# EAGLE board Board-v1.3 (EAGLE 9.7.0)
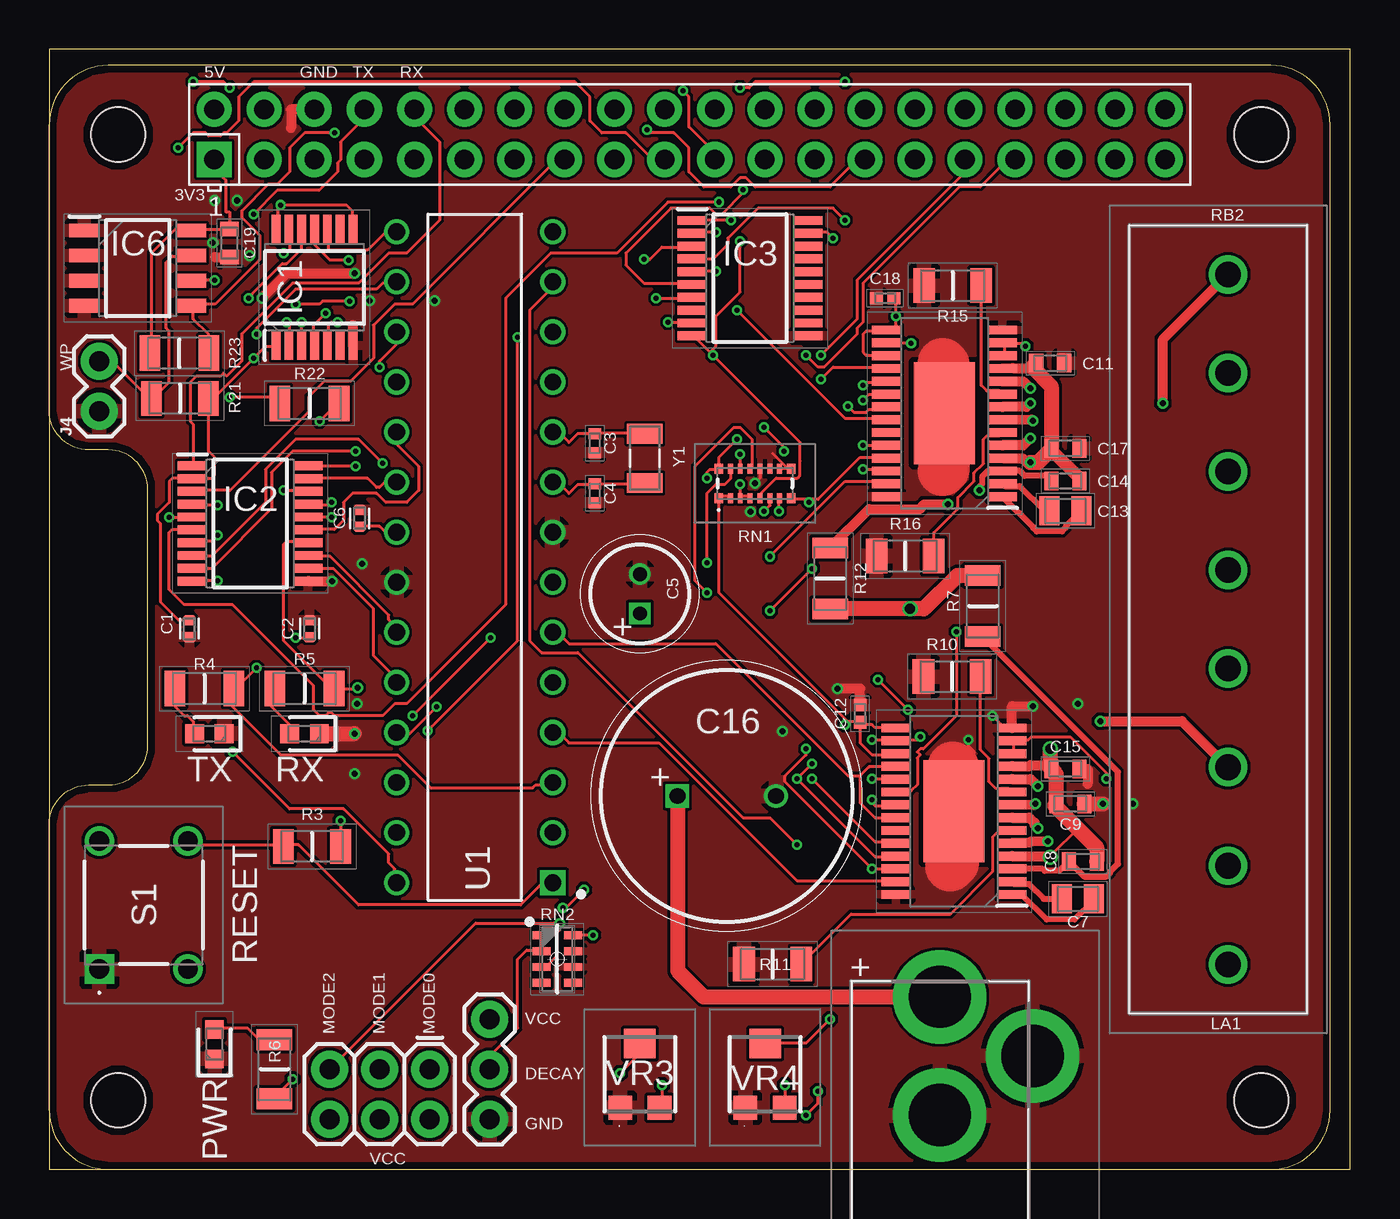
[diagram p0: board, top side]
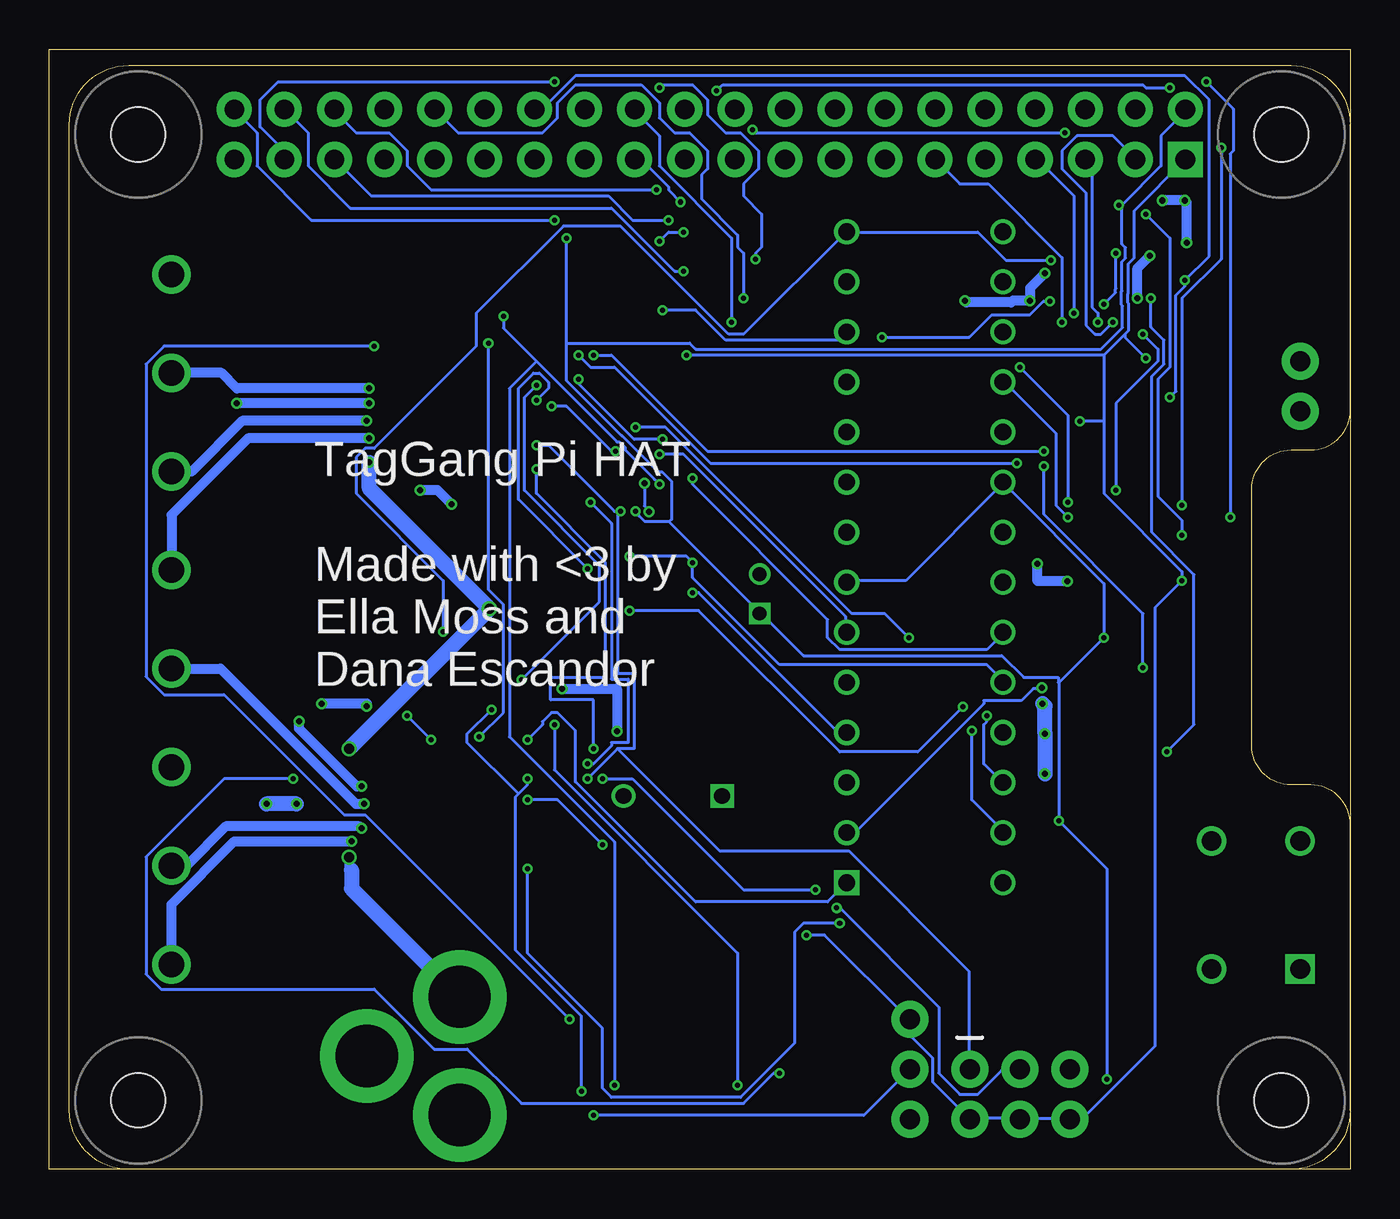
[diagram p1: board, bottom side, seen from below]

Size 66.02 x 56.82 mm. Coordinates in mm from the lower left corner, seen from the top.
Outline: 0,0 66.02,0 66.02,56.82 0,56.82 0,0
Copper layers (1*16): Top / Bottom
Stack-up Default Layer Stack: Top User Defined 0.035559375mm / Dielectric-1 User Defined 1.6mm / Bottom User Defined 0.035559375mm
Design rules "oshpark-2layer": minimum track width 6mil, minimum drill 10mil, track to track 6mil, track to pad 6mil, pad to pad 6mil, via to via 6mil, smd to smd 6mil, copper to edge 15mil, drill to drill 6mil, minimum pad ring 5mil, minimum via ring 5mil, stop-mask expansion 2.5mil, vias tented up to drill 0mil, thermal gap 10mil

## Footprints (pad centres in the part's own frame; a part is rotated, then mirrored left to right if it is on the bottom)
CAPC1005X55N = smd 0.54 x 0.6: 1 -0.43,0; 2 0.43,0
CAPC1005X55N' = smd 0.56 x 0.62: 1 -0.48,0; 2 0.48,0
CAPPRD200W52D500H1250 = drill 0.7 pad 1.1 square: 1 0,0 | drill 0.7 pad 1.1: 2 2,0
CAPC2012X94N = smd 1.02 x 1.47: 1 -0.81,0; 2 0.81,0
CAPC1608X90N = smd 0.73 x 0.94: 1 -0.71,0; 2 0.71,0
CAPC1005X55N'' = smd 0.65 x 0.62: 1 -0.44,0; 2 0.44,0
CAPPRD500W60D1275H2650 = drill 0.8 pad 1.2 square: 1 0,0 | drill 0.8 pad 1.2: 2 5,0
SOP65P640X120-14N = smd 1.475 x 0.45: 1 -2.938,1.95; 2 -2.938,1.3; 3 -2.938,0.65; 4 -2.938,0; 5 -2.938,-0.65; 6 -2.938,-1.3; 7 -2.938,-1.95; 8 2.938,-1.95; 9 2.938,-1.3; 10 2.938,-0.65; 11 2.938,0; 12 2.938,0.65; 13 2.938,1.3; 14 2.938,1.95
SOP65P640X120-20N = smd 1.475 x 0.45: 1 -2.938,2.925; 2 -2.938,2.275; 3 -2.938,1.625; 4 -2.938,0.975; 5 -2.938,0.325; 6 -2.938,-0.325; 7 -2.938,-0.975; 8 -2.938,-1.625; 9 -2.938,-2.275; 10 -2.938,-2.925; 11 2.938,-2.925; 12 2.938,-2.275; 13 2.938,-1.625; 14 2.938,-0.975; 15 2.938,-0.325; 16 2.938,0.325; 17 2.938,0.975; 18 2.938,1.625; 19 2.938,2.275; 20 2.938,2.925
SOP65P640X120-29N = smd 1.475 x 0.45: 1 -2.938,4.225; 2 -2.938,3.575; 3 -2.938,2.925; 4 -2.938,2.275; 5 -2.938,1.625; 6 -2.938,0.975; 7 -2.938,0.325; 8 -2.938,-0.325; 9 -2.938,-0.975; 10 -2.938,-1.625; 11 -2.938,-2.275; 12 -2.938,-2.925; 13 -2.938,-3.575; 14 -2.938,-4.225; 15 2.938,-4.225; 16 2.938,-3.575; 17 2.938,-2.925; 18 2.938,-2.275; 19 2.938,-1.625; 20 2.938,-0.975; 21 2.938,-0.325; 22 2.938,0.325; 23 2.938,0.975; 24 2.938,1.625; 25 2.938,2.275; 26 2.938,2.925; 27 2.938,3.575; 28 2.938,4.225 | smd 3.1 x 5.18: 29 0,0
SOIC127P600X175-8N = smd 1.525 x 0.7: 1 -2.712,1.905; 2 -2.712,0.635; 3 -2.712,-0.635; 4 -2.712,-1.905; 5 2.712,-1.905; 6 2.712,-0.635; 7 2.712,0.635; 8 2.712,1.905
1X03 = drill 1.016 pad 1.88: 1 0,0; 2 2.54,0; 3 5.08,0
PRT00119 = drill 3.162 pad 4.743: 1 -5.664,-1.286; 2 0.336,-1.286; 3 -2.664,3.414
TB00150008BE = drill 1.3 pad 1.95: 1 0,0; 2 5,0; 3 10,0; 4 15,0; 5 20,0; 6 25,0; 7 30,0; 8 35,0
1X02 = drill 1.016 pad 1.88: 1 0,0; 2 2.54,0
2X3 = drill 1.016 pad 1.88: 1 0,0; 2 0,2.54; 3 2.54,0; 4 2.54,2.54; 5 5.08,0; 6 5.08,2.54
LEDC1608X80N = smd 0.95 x 0.95: 1 -0.75,0; 2 0.75,0
RESC3116X65N = smd 1.05 x 1.75: 1 -1.45,0; 2 1.45,0
RESC3216X60N = smd 1.05 x 1.8: 1 -1.5,0; 2 1.5,0
RESC3216X70N = smd 1.05 x 1.8: 1 -1.55,0; 2 1.55,0
RESC3216X70N' = smd 1.1 x 1.75: 1 -1.45,0; 2 1.45,0
EXBU2H = smd 0.425 x 0.5: 1 -1.837,-0.75; 8 1.837,-0.75; 9 1.837,0.75; 16 -1.837,0.75 | smd 0.25 x 0.5: 2 -1.25,-0.75; 3 -0.75,-0.75; 4 -0.25,-0.75; 5 0.25,-0.75; 6 0.75,-0.75; 7 1.25,-0.75; 10 1.25,0.75; 11 0.75,0.75; 12 0.25,0.75; 13 -0.25,0.75; 14 -0.75,0.75; 15 -1.25,0.75
CAPCAV80P155X320X60-8L = smd 0.9 x 0.4: 1 -0.8,1.2; 2 0.8,1.2; 3 -0.8,0.4; 4 0.8,0.4; 5 -0.8,-0.4; 6 0.8,-0.4; 7 -0.8,-1.2; 8 0.8,-1.2
PTS645SH952LFS = drill 1 pad 1.5 square: 1 0,0 | drill 1 pad 1.5: 2 6.5,0; 3 0,-4.5; 4 6.5,-4.5
DIP794W46P254L2967H457Q28B = drill 0.85 square: 1 -3.96,16.51 | drill 0.85: 2 -3.96,13.97; 3 -3.96,11.43; 4 -3.96,8.89; 5 -3.96,6.35; 6 -3.96,3.81; 7 -3.96,1.27; 8 -3.96,-1.27; 9 -3.96,-3.81; 10 -3.96,-6.35; 11 -3.96,-8.89; 12 -3.96,-11.43; 13 -3.96,-13.97; 14 -3.96,-16.51; 15 3.96,-16.51; 16 3.96,-13.97; 17 3.96,-11.43; 18 3.96,-8.89; 19 3.96,-6.35; 20 3.96,-3.81; 21 3.96,-1.27; 22 3.96,1.27; 23 3.96,3.81; 24 3.96,6.35; 25 3.96,8.89; 26 3.96,11.43; 27 3.96,13.97; 28 3.96,16.51
TC33X2503E = smd 1.2 x 1.2: 1 -1,-1.7; 3 1,-1.7 | smd 1.6 x 1.5: 2 0,1.55
RASPI_BOARD_B+HAT_DF = drill 1 pad 1.778 square: 1 8.37,51.23 | drill 1 pad 1.778: 2 8.37,53.77; 3 10.91,51.23; 4 10.91,53.77; 5 13.45,51.23; 6 13.45,53.77; 7 15.99,51.23; 8 15.99,53.77; 9 18.53,51.23; 10 18.53,53.77; 11 21.07,51.23; 12 21.07,53.77; 13 23.61,51.23; 14 23.61,53.77; 15 26.15,51.23; 16 26.15,53.77; 17 28.69,51.23; 18 28.69,53.77; 19 31.23,51.23; 20 31.23,53.77; 21 33.77,51.23; 22 33.77,53.77; 23 36.31,51.23; 24 36.31,53.77; 25 38.85,51.23; 26 38.85,53.77; 27 41.39,51.23; 28 41.39,53.77; 29 43.93,51.23; 30 43.93,53.77; 31 46.47,51.23; 32 46.47,53.77; 33 49.01,51.23; 34 49.01,53.77; 35 51.55,51.23; 36 51.55,53.77; 37 54.09,51.23; 38 54.09,53.77; 39 56.63,51.23; 40 56.63,53.77 | hole 2.75: 3.5,3.5; 3.5,52.5; 61.5,3.5; 61.5,52.5
XTAL_CC7V-T1A-32.768KHZ-12.5PF-20PPM-TA-QC = smd 1 x 1.8: 1 -1.25,0; 2 1.25,0

## Placement (x,y rotation side)
C1  CC0402MRX5R6BB104  [CAPC1005X55N]  7.11,27.43 90 top
C2  CC0402MRX5R6BB104  [CAPC1005X55N]  13.21,27.43 270 top
C3  0402N150F500CT  [CAPC1005X55N']  27.69,36.83 90 top
C4  0402N150F500CT  [CAPC1005X55N']  27.69,34.29 90 top
C5  860020472001  [CAPPRD200W52D500H1250]  29.97,28.19 90 top
C6  CC0402MRX5R6BB104  [CAPC1005X55N]  15.75,33.02 90 top
C7  08055C103KAT4A  [CAPC2012X94N]  52.2,13.72 180 top
C8  CL10B104KA8NNNC  [CAPC1608X90N]  52.45,15.62 0 top
C9  CL10B104KA8NNNC  [CAPC1608X90N]  51.82,18.54 180 top
C11  CL10B104KA8NNNC  [CAPC1608X90N]  50.8,40.89 180 top
C12  C0402C474K9PACTU  [CAPC1005X55N'']  41.15,23.11 270 top
C13  08055C103KAT4A  [CAPC2012X94N]  51.56,33.4 180 top
C14  CL10B104KA8NNNC  [CAPC1608X90N]  51.56,34.92 0 top
C15  CL10B104KA8NNNC  [CAPC1608X90N]  51.56,20.32 180 top
C16  EGXF101ELL201MK25S  [CAPPRD500W60D1275H2650]  31.88,18.94 0 top
C17  CL10B104KA8NNNC  [CAPC1608X90N]  51.56,36.58 180 top
C18  C0402C474K9PACTU  [CAPC1005X55N'']  42.42,44.2 0 top
C19  CL10B104KA8NNNC  [CAPC1608X90N]  9.14,46.99 90 top
IC1  TXS0104EPWR  [SOP65P640X120-14N]  13.46,44.74 90 top
IC2  TXS0108EPWRG4  [SOP65P640X120-20N]  10.2,32.77 0 top
IC3  TXS0108EPWRG4  [SOP65P640X120-20N]  35.56,45.21 0 top
IC4  DRV8825PWPR  [SOP65P640X120-29N]  45.91,18.17 180 top
IC5  DRV8825PWPR  [SOP65P640X120-29N]  45.43,38.35 180 top
IC6  CAT24C32WI-GT3  [SOIC127P600X175-8N]  4.49,45.72 0 top
J1  [1X03]  22.35,2.54 90 top
J2  PRT-00119  [PRT00119]  46.48,3.09 270 top
J3  TB001-500-08BE  [TB00150008BE]  59.82,10.4 90 top
J4  [1X02]  2.54,38.46 90 top
J5  FEMALE 2x3  [2X3]  19.3,5.08 180 top
PWR  150060GS75000  [LEDC1608X80N]  8.38,6.35 90 top
R3  CRGCQ1206F1K0  [RESC3116X65N]  13.34,16.38 0 top
R4  CRCW1206360RJNEA  [RESC3216X60N]  7.87,24.38 0 top
R5  CRCW1206360RJNEA  [RESC3216X60N]  12.95,24.38 0 top
R6  CRCW1206360RJNEA  [RESC3216X60N]  11.43,5.08 90 top
R7  RK73B2BTTD105J  [RESC3216X70N]  47.37,28.57 90 top
R10  73L4R20J  [RESC3216X70N']  45.81,25 0 top
R11  73L4R20J  [RESC3216X70N']  36.7,10.41 0 top
R12  RK73B2BTTD105J  [RESC3216X70N]  39.62,29.97 270 top
R15  73L4R20J  [RESC3216X70N']  45.85,44.83 0 top
R16  73L4R20J  [RESC3216X70N']  43.43,31.11 0 top
R21  CRGCQ1206F1K0  [RESC3116X65N]  6.63,39.12 0 top
R22  CRCW12063K90FKEA  [RESC3216X60N]  13.21,38.86 0 top
R23  CRCW12063K90FKEA  [RESC3216X60N]  6.6,41.4 180 top
RN1  EXB-U2H103JV  [EXBU2H]  35.81,34.8 0 top
RN2  CAT16-103J4LF  [CAPCAV80P155X320X60-8L]  25.78,10.67 0 top
RX  150060RS75000  [LEDC1608X80N]  12.95,22.1 180 top
S1  PTS645SH952LFS  [PTS645SH952LFS]  2.54,10.16 90 top
TX  150060GS75000  [LEDC1608X80N]  8.13,22.1 180 top
U1  ATMEGA328P-PU  [DIP794W46P254L2967H457Q28B]  21.59,31.05 180 top
VR3  TC33X-2-103G  [TC33X2503E]  29.97,4.83 0 top
VR4  TC33X-2-103G  [TC33X2503E]  36.32,4.83 0 top
X1  RASPI_BOARD_B+_HD  [RASPI_BOARD_B+HAT_DF]  0,0 0 top
Y1  CC7V-T1A-32.768KHZ-12.5PF-20PPM-TA-QC  [XTAL_CC7V-T1A-32.768KHZ-12.5PF-20PPM-TA-QC]  30.23,36.07 270 top

## Library data of the parts
C1 C2 C6 = CC0402MRX5R6BB104; DESCRIPTION: 0.1 µF ±20% 10V Ceramic Capacitor X5R 0402 (1005 Metric); DIGIKEY_PART_NUMBER: 311-1731-2-ND; MF: Yageo; MP: CC0402MRX5R6BB104; PACKAGE: 0402 Yageo; PURCHASE-URL: https://pricing.snapeda.com/search?q=CC0402MRX5R6BB104&ref=eda
C3 C4 = 0402N150F500CT; DESCRIPTION: Multilayer Ceramic Capacitors MLCC - SMD/SMT 0402 MLCC NPO 15 pF +/- 1% 50 V T&R GP; HEIGHT: 0.55mm; MANUFACTURER_NAME: Walsin Technology Corporation; MANUFACTURER_PART_NUMBER: 0402N150F500CT
C5 = 860020472001; DESCRIPTION: Wurth Elektronik 4.7uF 25 V dc Aluminium Electrolytic Capacitor, WCAP-ATG5 Series 2000h 5 (Dia.) x 11mm; HEIGHT: 12.5mm; MANUFACTURER_NAME: Wurth Elektronik; MANUFACTURER_PART_NUMBER: 860020472001; MOUSER_PART_NUMBER: 710-860020472001; MOUSER_PRICE-STOCK: https://www.mouser.co.uk/ProductDetail/Wurth-Elektronik/860020472001?qs=0KOYDY2FL2%2F%252BlYkeK95R6A%3D%3D
C7 C13 = 08055C103KAT4A; DESCRIPTION: Multilayer Ceramic Capacitors MLCC - SMD/SMT 50V .01uF X7R 0805 10%TOL; HEIGHT: 0.94mm; MANUFACTURER_NAME: AVX; MANUFACTURER_PART_NUMBER: 08055C103KAT4A; MOUSER_PART_NUMBER: 581-08055C103KAT4A; MOUSER_PRICE-STOCK: https://www.mouser.com/Search/Refine.aspx?Keyword=581-08055C103KAT4A
C8 C9 C11 C14 C15 C17 C19 = CL10B104KA8NNNC; DESCRIPTION: Ceramic cap 0603 X7R 25V 100nF (Reel) Samsung Electro-Mechanics 100nF Multilayer Ceramic Capacitor (MLCC) 25 V +/-10% X7R dielectric CL max op. temp. +125C; HEIGHT: 0.9mm; MANUFACTURER_NAME: SAMSUNG; MANUFACTURER_PART_NUMBER: CL10B104KA8NNNC; MOUSER_PART_NUMBER: 187-CL10B104KA8NNNC; MOUSER_PRICE-STOCK: https://www.mouser.co.uk/ProductDetail/Samsung-Electro-Mechanics/CL10B104KA8NNNC?qs=349EhDEZ59rmu3pGeZXx0A%3D%3D
C12 C18 = C0402C474K9PACTU; DESCRIPTION: SMD Comm X5R, Ceramic, 0.47 uF, 10%, 6.3 VDC, 15.75 VDC, 85C, -55C, X5R, SMD, MLCC, Temperature Stable, Class II, 10 % , 1.0638 GOhms, 1.21 mg, 0402, 1mm, 0.5mm, 0.5mm, 0.3mm, 0.3mm, 10000, 78 Weeks, 70; HEIGHT: 0.55mm; MANUFACTURER_NAME: KEMET; MANUFACTURER_PART_NUMBER: C0402C474K9PACTU; MOUSER_PART_NUMBER: 80-C0402C474K9P; MOUSER_PRICE-STOCK: https://www.mouser.co.uk/ProductDetail/KEMET/C0402C474K9PACTU?qs=KHg1sw%2FVM5RivoKJ3oVJkQ%3D%3D
C16 = EGXF101ELL201MK25S; DESCRIPTION: Aluminum Electrolytic Capacitors - Radial Leaded 200uF 100 Volts 20%; HEIGHT: 26.5mm; MANUFACTURER_NAME: Chemi-Con; MANUFACTURER_PART_NUMBER: EGXF101ELL201MK25S; MOUSER_PART_NUMBER: 661-EGXF101ELL201MK2; MOUSER_PRICE-STOCK: https://www.mouser.co.uk/ProductDetail/United-Chemi-Con/EGXF101ELL201MK25S?qs=8BXZADTIn4FXlUL9JzZ4Ow%3D%3D
IC1 = TXS0104EPWR; DESCRIPTION: TXS0104EPWR, Voltage Level Translator, Open Drain 1.65 3.6 V, 2.3 5.5 V 14-Pin TSSOP; HEIGHT: 1.2mm; MANUFACTURER_NAME: Texas Instruments; MANUFACTURER_PART_NUMBER: TXS0104EPWR; MOUSER_PART_NUMBER: 595-TXS0104EPWR; MOUSER_PRICE-STOCK: https://www.mouser.co.uk/ProductDetail/Texas-Instruments/TXS0104EPWR?qs=7kv20MEVUlglsv2MH6ZndA%3D%3D
IC2 IC3 = TXS0108EPWRG4; DESCRIPTION: Translation - Voltage Levels 8B Bidir Vltg-Level Translator; HEIGHT: 1.2mm; MANUFACTURER_NAME: Texas Instruments; MANUFACTURER_PART_NUMBER: TXS0108EPWRG4; MOUSER_PART_NUMBER: 595-TXS0108EPWRG4; MOUSER_PRICE-STOCK: https://www.mouser.co.uk/ProductDetail/Texas-Instruments/TXS0108EPWRG4?qs=wkx8pu8tL7LKCwSiM1j4%252Bw%3D%3D
IC4 IC5 = DRV8825PWPR; DESCRIPTION: 2.5A Bipolar Stepper Motor Driver with On-Chip 1/32 Microstepping Indexer (Step/Dir Ctrl); HEIGHT: 1.2mm; MANUFACTURER_NAME: Texas Instruments; MANUFACTURER_PART_NUMBER: DRV8825PWPR; MOUSER_PART_NUMBER: 595-DRV8825PWPR; MOUSER_PRICE-STOCK: https://www.mouser.co.uk/ProductDetail/Texas-Instruments/DRV8825PWPR?qs=L4ss%2FyqpMWRQV%252B0JWK8r%2FQ%3D%3D
IC6 = CAT24C32WI-GT3; DESCRIPTION: EEPROM Serial-I2C 32K 4Kx8 1.8V/5V SOIC8 CAT24C32WI-GT3, EEPROM Memory 32kbit,, 4096 x, 8bit, Serial-I2C 1.7 5.5 V, 8-Pin SOIC; HEIGHT: 1.75mm; MANUFACTURER_NAME: onsemi; MANUFACTURER_PART_NUMBER: CAT24C32WI-GT3; MOUSER_PART_NUMBER: 698-CAT24C32WI-GT3; MOUSER_PRICE-STOCK: https://www.mouser.co.uk/ProductDetail/onsemi/CAT24C32WI-GT3?qs=rZgeL6XvLwaTa79VuYkKQA%3D%3D
J1 J4 = SparkFun-Connectors
J2 = PRT-00119; DESCRIPTION: SparkFun Accessories DC Barrel Power Jack/Connector; HEIGHT: 11mm; MANUFACTURER_NAME: SparkFun; MANUFACTURER_PART_NUMBER: PRT-00119; MOUSER_PART_NUMBER: 474-PRT-00119; MOUSER_PRICE-STOCK: https://www.mouser.co.uk/ProductDetail/SparkFun/PRT-00119?qs=WyAARYrbSnbnQpS9xf%252Bx5A%3D%3D
J3 = TB001-500-08BE; DESCRIPTION: Fixed Terminal Blocks Terminal block, screw type, 5.00 , horizontal, 8 poles, CUI Blue, slotted screw, PCB mount; HEIGHT: 12.9mm; MANUFACTURER_NAME: CUI Devices; MANUFACTURER_PART_NUMBER: TB001-500-08BE; MOUSER_PART_NUMBER: 490-TB001-500-08BE; MOUSER_PRICE-STOCK: https://www.mouser.co.uk/ProductDetail/CUI-Devices/TB001-500-08BE?qs=vLWxofP3U2yEuwKNSzgFJw%3D%3D
J5 = SparkFun-Connectors; PROD_ID: CONN-11566
PWR TX = 150060GS75000; DESCRIPTION: Wurth Elektronik WL-SMCW 520 nm Green LED, 1608 (0603) Clear SMD package; HEIGHT: 0.8mm; MANUFACTURER_NAME: Wurth Elektronik; MANUFACTURER_PART_NUMBER: 150060GS75000; MOUSER_PART_NUMBER: 710-150060GS75000; MOUSER_PRICE-STOCK: https://www.mouser.co.uk/ProductDetail/Wurth-Elektronik/150060GS75000?qs=LlUlMxKIyB0UYkq5lDO8nA%3D%3D
R3 R21 = CRGCQ1206F1K0; DESCRIPTION: SMD AEC-Q200 Compliant Thick Film Chip Resistor,; HEIGHT: 0.65mm; MANUFACTURER_NAME: TE Connectivity; MANUFACTURER_PART_NUMBER: CRGCQ1206F1K0; MOUSER_PART_NUMBER: 279-CRGCQ1206F1K0; MOUSER_PRICE-STOCK: https://www.mouser.co.uk/ProductDetail/TE-Connectivity-Holsworthy/CRGCQ1206F1K0?qs=wUXugUrL1qxm2LgdVtGvlQ%3D%3D
R4-R6 = CRCW1206360RJNEA; DESCRIPTION: Thick Film Resistors - SMD 1/4watt 360ohms 5%; HEIGHT: 0.6mm; MANUFACTURER_NAME: Vishay; MANUFACTURER_PART_NUMBER: CRCW1206360RJNEA; MOUSER_PART_NUMBER: 71-CRCW1206J-360-E3; MOUSER_PRICE-STOCK: https://www.mouser.co.uk/ProductDetail/Vishay-Dale/CRCW1206360RJNEA?qs=f6iYHOF0qgQa5fU%252BdQhP8Q%3D%3D
R7 R12 = RK73B2BTTD105J; DESCRIPTION: Thick Film Resistors - SMD 1/4watts 1Mohms 5%; HEIGHT: 0.7mm; MANUFACTURER_NAME: KOA Speer; MANUFACTURER_PART_NUMBER: RK73B2BTTD105J
R10 R11 R15 R16 = 73L4R20J; DESCRIPTION: Current Sense Resistors - SMD 0.2ohms 5%; HEIGHT: 0.7mm; MANUFACTURER_NAME: CTS; MANUFACTURER_PART_NUMBER: 73L4R20J; MOUSER_PART_NUMBER: 774-73L4R20J; MOUSER_PRICE-STOCK: https://www.mouser.co.uk/ProductDetail/CTS-Electronic-Components/73L4R20J?qs=hbgUSdfWRJU6l%2FyD8DKbaA%3D%3D
R22 R23 = CRCW12063K90FKEA; DESCRIPTION: CRCW1206 Resistor T/R 0.25W,1%,3K9 Vishay CRCW Series Thick Film Surface Mount Resistor 1206 Case 3.9k +/-1% 0.25W +/-100ppm/C; HEIGHT: 0.6mm; MANUFACTURER_NAME: Vishay; MANUFACTURER_PART_NUMBER: CRCW12063K90FKEA; MOUSER_PART_NUMBER: 71-CRCW1206-3.9K-E3; MOUSER_PRICE-STOCK: https://www.mouser.co.uk/ProductDetail/Vishay-Dale/CRCW12063K90FKEA?qs=cIcnZvs8mCNkQ0vWXL23Cw%3D%3D
RN1 = EXB-U2H103JV; DESCRIPTION: Series/Type: Anti-Sulfurated Chip Resistor Array, Power Rating (W): 0.063, Chip Size (LxW) (mm): 3.8 X 1.6, Resistance Values (): 10000, Resistance Tolerance (%): 5, Terminal Pitch (mm): 0.5, Type of Circuit: Isolated Circuit, Number of Elements (piece): 8, T.C.R (10/K): +/-200, Number of Terminals (piece): 16; HEIGHT: 0.55mm; MANUFACTURER_NAME: Panasonic; MANUFACTURER_PART_NUMBER: EXB-U2H103JV; MOUSER_PART_NUMBER: 667-EXB-U2H103JV; MOUSER_PRICE-STOCK: https://www.mouser.co.uk/ProductDetail/Panasonic/EXB-U2H103JV?qs=Z3CaLxJiOJJ7jC1v10U%2Fjw%3D%3D
RN2 = CAT16-103J4LF; DESCRIPTION: 4-array concave 1206 LF resistor,10K Bourns CAT16 Series 10k 5% Isolated SMT Resistor Array, 4 Resistors, 0.25W total 1206 Package; HEIGHT: 0.6mm; MANUFACTURER_NAME: Bourns; MANUFACTURER_PART_NUMBER: CAT16-103J4LF; MOUSER_PART_NUMBER: 652-CAT16-103J4LF; MOUSER_PRICE-STOCK: https://www.mouser.co.uk/ProductDetail/Bourns/CAT16-103J4LF?qs=yksRZAkH7gsi20GVw368rQ%3D%3D
RX = 150060RS75000; DESCRIPTION: WURTH ELEKTRONIK - 150060RS75000 - LED, 0603, RED, 250MCD, 625NM; HEIGHT: 0.8mm; MANUFACTURER_NAME: Wurth Elektronik; MANUFACTURER_PART_NUMBER: 150060RS75000; MOUSER_PART_NUMBER: 710-150060RS75000; MOUSER_PRICE-STOCK: https://www.mouser.co.uk/ProductDetail/Wurth-Elektronik/150060RS75000?qs=LlUlMxKIyB3QnmZ3fw%2FVCA%3D%3D
S1 = PTS645SH952LFS; DESCRIPTION: SWITCH TACTILE SPST-NO 0.05A 12V; HEIGHT: 4.4mm; MANUFACTURER_NAME: C & K COMPONENTS; MANUFACTURER_PART_NUMBER: PTS645SH952LFS; MOUSER_PART_NUMBER: 611-PTS645SH952; MOUSER_PRICE-STOCK: https://www.mouser.co.uk/ProductDetail/CK/PTS645SH952LFS?qs=FQH5YrIbzh%252B2bZJSGdqIFg%3D%3D
U1 = ATMEGA328P-PU; MANUFACTURER: Atmel
VR3 VR4 = TC33X-2-103G; DESCRIPTION: Trimmer Resistors - SMD 3MM 10KOHMS 25% 0.1WATT OPEN FRM; HEIGHT: 1.2mm; MANUFACTURER_NAME: Bourns; MANUFACTURER_PART_NUMBER: TC33X-2-103G; MOUSER_PART_NUMBER: 652-TC33X-2-103G; MOUSER_PRICE-STOCK: https://www.mouser.co.uk/ProductDetail/Bourns/TC33X-2-103G?qs=fmZCN1JtwVGHgHrSUcsPzA%3D%3D
X1 = raspberrypi_bastelstube_v13
Y1 = CC7V-T1A-32.768KHZ-12.5PF-20PPM-TA-QC; AVAILABILITY: In Stock; DESCRIPTION: LOW FREQUENCY CRYSTAL; MF: Micro Crystal; MP: CC7V-T1A-32.768kHz-12.5pF-20PPM-TA-QC; PACKAGE: SMD-2 Micro Crystal; PRICE: None; PURCHASE-URL: https://pricing.snapeda.com/search?q=CC7V-T1A-32.768kHz-12.5pF-20PPM-TA-QC&ref=eda

## Nets
3V3: C1.2 C19.2 IC1.1 IC2.2 IC2.10 IC3.2 IC3.10 IC6.8 J1.3 J5.2 J5.4 J5.6 R21.2 R22.2 R23.2 RN1.5 RN2.2 X1.1
5V: C2.2 C5.1 IC1.8 IC1.14 IC2.19 IC3.19 R3.2 R6.1 RN1.6 U1.7 U1.20 X1.2
24V: C8.2 C9.2 C11.2 C14.2 C15.2 C16.1 C17.2 IC4.4 IC4.11 IC5.4 IC5.11 J2.1 R7.2 R12.2
EEPROM_ID_SC: IC6.6 R22.1 X1.28
EEPROM_ID_SD: IC6.5 R23.1 X1.27
GND: C1.1 C2.1 C3.1 C4.1 C5.2 C6.2 C9.1 C11.1 C12.1 C15.1 C16.2 C17.1 C18.1 C19.1 IC1.7 IC2.11 IC3.11 IC4.14 IC4.28 IC4.29 IC5.14 IC5.28 IC5.29 IC6.1 IC6.2 IC6.3 IC6.4 J1.1 J2.2 J2.3 J4.1 PWR.1 R10.1 R11.1 R15.1 R16.1 RN1.9 RN1.10 RN1.11 RN1.12 RN2.4 RN2.6 RX.1 S1.1 TX.1 U1.8 U1.22 VR3.1 VR4.1 X1.6
GPIO2_SDA: IC1.2 X1.3
GPIO3_SCL: IC1.3 X1.5
GPIO4: IC1.4 X1.7
GPIO6: IC2.8 X1.31
GPIO7_CE1: X1.26
GPIO7_CEI: IC3.8
GPIO8_CE0: IC3.9 X1.24
GPIO9_SDI: IC2.5 X1.21
GPIO10_SDO: IC2.4 X1.19
GPIO11_SCK: IC2.6 X1.23
GPIO12_PWM0: IC3.7 X1.32
GPIO13_PWM1: IC2.9 X1.33
GPIO14_TX: IC2.7 X1.8
GPIO15_RX: IC2.1 X1.10
GPIO16: IC3.6 X1.36
GPIO17: IC1.5 X1.11
GPIO19: IC3.1 X1.35
GPIO20: IC3.5 X1.38
GPIO21: IC3.4 X1.40
GPIO22: IC2.3 X1.15
GPIO26: IC3.3 X1.37
JDECAY: IC4.19 IC5.19 J1.2 RN2.1 RN2.3
JM0: IC4.24 IC5.24 J5.1 RN1.7
JM1: IC4.25 IC5.25 J5.3 RN1.8
JM2: IC4.26 IC5.26 J5.5 RN2.5
L3V3: C12.2 IC4.15 IC4.17 RN1.1 RN1.2 VR3.3
LAOUT1: IC4.5 J3.1
LAOUT2: IC4.7 J3.2
LBOUT1: IC4.10 J3.3
LBOUT2: IC4.8 J3.4
LISENA: IC4.6 R11.2
LISENB: IC4.9 R10.2
LVREF: IC4.12 IC4.13 VR3.2
N$1: C13.1 IC5.1
N$2: R5.1 RX.2
N$3: PWR.2 R6.2
N$4: C6.1 U1.21
N$5: C7.1 IC4.1
N$6: C7.2 IC4.2
N$7: C13.2 IC5.2
N$8: C8.1 IC4.3 R7.1
N$9: C14.1 IC5.3 R12.1
N$10: R4.1 TX.2
N$11: IC6.7 J4.2 R21.1
N$12: IC3.12
N$13: IC3.13
N$14: IC3.14
N$15: IC3.15
N$16: IC3.16
N$17: IC3.17
N$18: IC3.18
N$19: IC3.20
PB0: IC1.11 IC4.20 U1.14
PB1: IC1.10 U1.15
PB2_CS#: IC2.18 U1.16
PB3_SDI: IC2.17 U1.17
PB4_SDO: IC2.16 U1.18
PB5_SCK: IC2.15 U1.19
PC0: IC2.13 IC5.18 RN1.16 U1.23
PC1: IC2.12 IC5.27 RN1.15 U1.24
PC2: IC5.20 U1.25
PC3: IC5.21 U1.26
PC4_SDA: IC1.13 U1.27
PC5_SCL: IC1.12 U1.28
PD0_RX: IC2.14 R5.2 U1.2
PD1_TX: IC2.20 R4.2 U1.3
PD2: IC4.27 RN1.13 U1.4
PD3: U1.5
PD4: IC4.18 IC4.22 RN1.14 U1.6
PD5: U1.11
PD6: IC5.22 U1.12
PD7: IC4.21 U1.13
R3V3: C18.2 IC5.15 IC5.17 RN1.3 RN1.4 VR4.3
RAOUT1: IC5.5 J3.5
RAOUT2: IC5.7 J3.6
RBOUT1: IC5.10 J3.7
RBOUT2: IC5.8 J3.8
RESET#: IC4.16 IC5.16 R3.1 S1.4 U1.1
RISENA: IC5.6 R16.2
RISENB: IC5.9 R15.2
RVREF: IC5.12 IC5.13 VR4.2
XTAL1: C4.2 U1.9 Y1.2
XTAL2: C3.2 U1.10 Y1.1

## Tracks (layer width: path | path; a pad name or v marks a point on that pad's centre or on a via)
3V3  (via drill 0.25)
  Top 0.152: v27.58,11.89 26.67,11.89 RN2.2 | IC1.1 11.43,41.76 10.97,41.76 v10.36,41.15 8.23,39.01 R21.2 8.08,39.01 8.08,36.42 8.38,36.12 8.38,35.2 8.23,35.05 7.32,35.05 IC2.2 7.16,35.05 6.25,35.05 6.1,34.9 6.1,33.83 5.49,33.22 5.49,32.92 5.64,32.77 5.64,28.8 6.55,27.89 7.01,27.89 C1.2 | 33.53,41.45 32.92,42.06 32.92,42.22 32.77,42.37 IC3.10 | 33.53,41.45 v33.68,41.3 38.1,36.88 38.1,35.94 38.09,35.93 38.09,35.2 37.96,35.07 36.89,35.07 36.12,34.3 36.12,34.14 RN1.5 | v33.83,47.55 32.77,47.55 IC3.2 | v35.05,47.09 35.05,44.5 33.83,43.28 33.83,41.76 33.53,41.45 | C19.2 7.32,47.7 IC6.8 7.16,47.7 6.4,47.7 5.18,46.48 5.18,41.45 R23.2 | v8.53,29.87 7.32,29.87 IC2.10 | v13.72,37.95 14.63,38.86 R22.2 | C19.2 | X1.1 8.38,51.21 8.38,50.75 8.95,50.18 8.95,48.58 9.14,48.58 C19.2
  Bottom 0.152: v27.58,11.89 26.67,11.89 22.4,7.62 J1.3 22.25,7.62 22.25,6.71 21.18,5.64 21.18,4.42 J5.2 19.2,2.59 16.76,2.59 | 16.76,2.59 14.33,2.59 J5.6 14.17,2.59 13.56,2.59 9.91,6.25 9.91,28.5 v8.53,29.87 8.53,30.33 12.5,34.29 12.5,37.95 | 16.76,2.59 J5.4 | v33.83,47.55 34.59,47.55 v35.05,47.09 | 12.5,41.3 12.5,37.95 | 11.43,42.37 12.5,41.3 | X1.1 8.38,51.21 10.97,48.62 10.97,46.23 11.28,45.92 11.28,44.43 11.3,44.41 11.3,43.99 11.25,43.94 11.25,42.55 11.43,42.37 | 12.5,37.95 v13.72,37.95 | 12.5,41.3 v33.68,41.3 | v10.36,41.15 11.43,42.22 11.43,42.37
5V  (via drill 0.25)
  Top 0.152: v12.5,26.98 13.11,26.98 C2.2 | IC2.19 13.26,35.05 16.15,35.05 16.61,34.59 16.76,34.59 17.07,34.9 17.53,34.9 U1.20 | v14.78,17.68 14.78,16.46 R3.2 | v12.34,4.57 11.43,3.66 R6.1 | IC1.14 11.58,47.7 11.58,48.77 v11.73,48.92 15.09,48.92 15.39,48.62 15.39,47.7 IC1.8 | v36.27,33.38 36.58,33.68 36.58,33.98 RN1.6 | v39.78,47.24 39.47,47.55 38.56,47.55 IC3.19
  Bottom 0.152: 14.78,24.69 v14.78,17.68 12.34,15.24 v12.34,4.57 | 14.78,24.69 v12.5,26.98 12.5,29.72 17.53,34.75 U1.20 17.68,34.75 22.55,29.87 25.45,29.87 U1.7 | 11.58,48.92 9.6,50.9 9.6,52.43 8.38,53.65 X1.2 | 34.56,32.86 29.97,28.27 C5.1 29.87,28.19 27.74,26.06 17.68,26.06 16.57,24.96 14.82,24.96 14.82,24.69 14.78,24.69 | 39.78,41.91 v39.78,47.24 | 11.58,48.92 11.58,46.94 11.4,46.76 11.4,46.22 11.58,46.05 11.58,44.56 11.61,44.53 11.61,43.86 11.56,43.81 11.56,42.7 12.65,41.6 33.22,41.6 33.53,41.91 39.78,41.91 | 11.58,48.92 v11.73,48.92 | 39.78,41.91 39.78,40.01 36.98,37.21 36.96,37.21 35.11,35.36 34.9,35.36 34.44,34.9 34.44,32.98 34.56,32.86 | 34.56,32.86 35.8,32.86 36.09,33.16 36.09,33.2 v36.27,33.38
24V  (via drill 0.3, 0.51 pad 0.76)
  Top 0.152: C17.2 50.9,36.58 50.84,36.51 | IC5.4 48.46,36.12 48.46,36.06 | 52.19,17.29 50.9,16 v50.8,15.82
  Top 0.483: IC5.11 48.38,40.64 48.9,40.64 | IC4.11 48.87,20.46
  Top 0.508: IC4.4 50.74,15.89 v50.8,15.82 | 48.87,20.46 49.76,20.46 49.8,20.5 50.67,20.5 50.8,20.37 | v49.78,35.86 49.6,35.86 49.41,36.06 48.46,36.06 | C11.2 49.84,40.64 48.9,40.64
  Top 0.635: C14.2 52.27,35.08 50.84,36.51
  Top 0.762: v50.8,21.34 50.8,20.37 C15.2 51.11,20.07 C9.2 51.02,18.46 52.19,17.29 53.16,16.32 C8.2 | R12.2 39.65,28.45 v43.69,28.45 43.7,28.44 44.38,28.44 46.07,30.12 R7.2 | v49.78,35.86 50.19,35.86 50.84,36.51 | C11.2 49.88,40.68 50.85,39.71 C17.2 | C16.1 31.88,10.08 33.21,8.75 J2.1
  Bottom 0.508: 50.68,15.2 50.8,15.31 v50.8,15.82
  Bottom 0.762: v50.8,21.34 v43.69,28.45 49.78,34.54 v49.78,35.86 | 50.68,15.2 50.68,14.24 J2.1
EEPROM_ID_SC  (via drill 0.25)
  Top 0.152: v8.38,45.11 7.32,45.11 IC6.6 | v9.14,39.17 11.28,39.17 11.58,38.86 R22.1
  Bottom 0.152: v9.14,39.17 8.84,39.47 8.84,44.35 8.38,44.81 v8.38,45.11 7.16,46.33 7.16,54.25 8.38,55.47 39.32,55.47 41,53.8 41.3,53.8 X1.28
EEPROM_ID_SD  (via drill 0.25)
  Top 0.152: R23.1 8.08,41.45 8.08,42.37 7.32,43.13 7.32,43.74 IC6.5 7.32,43.89 8.41,43.89 10.67,46.15 10.67,47.4 9.75,48.31 9.75,48.62 11.1,49.96 11.56,49.96 12.19,50.6 12.19,51.82 12.95,52.58 v14.48,52.58 | v30.33,52.73 30.48,52.58 31.7,52.58 32.46,51.82 32.46,50.6 33.22,49.84 34.59,49.84 35.05,50.29 35.36,50.29 35.81,49.84 39.62,49.84 41,51.21 41.3,51.21 X1.27
  Bottom 0.152: v14.48,52.58 30.18,52.58 v30.33,52.73
GND  (via drill 0.25, 0.3)
  Top 0.152: v47.85,23.01 48.46,22.4 48.77,22.4 IC4.14 | v46.63,21.79 46.63,21.49 46.94,21.18 46.94,19.2 46.02,18.29 IC4.29 | 36.7,36.32 37.48,35.55 RN1.9 RN1.10 | RN1.12 36.06,35.05 v35.81,34.8
  Top 0.508: C15.1 52.7,20.32 52.7,19.56 | IC4.14 48.85,23.5 v49.91,23.5 | X1.6 12.27,53.77 12.27,52.83 | 8.4,46.28 C19.1 | C12.1 41.15,24.38 v40.01,24.38 | IC2.11 14.35,29.84 v14.35,29.83 | v10.79,44.2 12.06,45.47 v15.49,45.47 | IC1.7 15.41,42.84
  Top 0.762: RX.1 v15.49,22.1 | C9.1 v53.47,18.54
  Top 2.54: 45.34,40.89 45.44,40.8 IC5.29 45.44,35.53 45.34,35.43 | 45.85,20.45 45.91,20.38 IC4.29 45.91,15.56 45.72,15.37
  Bottom 0.152: v46.63,21.79 v47.85,23.01 | v35.81,34.8 35.81,33.66 35.59,33.43 | 35.59,33.43 | 35.59,33.43 v35.59,33.37
  Bottom 0.508: v49.91,23.5 49.91,23.62 v52.2,23.62 | v9.53,49.15 v8.4,49.15 8.3,49.06 v8.3,47 | v40.01,24.38 37.21,24.38 v37.21,22.23 | v14.35,29.83 15.88,29.83 v15.88,30.73 | v10.79,44.2 10.79,45.72 v10.16,46.35 | v15.49,45.47 16.26,44.7 v16.26,44.07 17.11,44.07 17.2,43.98 19.47,43.98 v19.56,44.07
  Bottom 0.762: v15.49,20.07 v15.49,22.1 15.49,23.5 v15.62,23.62 | v53.47,18.54 v54.99,18.54
  pour Top: 68.45,-1.52 68.45,58.67 -3.17,58.67 -3.17,-1.52
GPIO2_SDA  (via drill 0.25)
  Top 0.152: v12.04,42.98 12.19,42.82 12.19,41.91 IC1.2
  Bottom 0.152: v12.04,42.98 12.65,42.37 12.95,42.37 13.41,42.82 13.41,49.53 14.63,50.75 14.63,51.66 13.87,52.43 12.04,52.43 10.97,51.36 X1.3
GPIO3_SCL  (via drill 0.25)
  Top 0.152: v12.8,42.98 12.8,41.91 IC1.3
  Bottom 0.152: v12.8,42.98 12.8,43.43 13.11,43.74 13.11,50.9 13.41,51.21 X1.5
GPIO4  (via drill 0.25)
  Top 0.152: v14.02,43.43 13.41,42.82 13.41,41.91 IC1.4
  Bottom 0.152: v14.02,43.43 14.02,49.38 15.85,51.21 X1.7
GPIO6  (via drill 0.25)
  Top 0.152: v16.92,35.81 15.7,37.03 12.5,37.03 10.97,35.51 10.97,33.83 8.23,31.09 7.32,31.09 IC2.8 | v39.17,41.3 41,43.13 41,45.11 46.33,50.44 46.33,51.21 X1.31
  Bottom 0.152: v16.92,35.81 32.46,35.81 37.34,40.69 38.56,40.69 v39.17,41.3
GPIO8_CE0  (via drill 0.25)
  Top 0.152: v31.39,42.98 32.61,42.98 IC3.9
  Bottom 0.152: v31.39,42.98 31.39,47.24 35.05,50.9 35.05,52.43 36.27,53.65 X1.24
GPIO9_SDI  (via drill 0.25)
  Top 0.152: v6.1,33.07 7.16,33.07 IC2.5 | v7.32,55.17 8.84,55.17 v9.14,54.86 | v32.16,54.71 32.46,54.41 32.46,52.88 33.68,51.66 33.68,51.36 X1.21
  Bottom 0.152: v6.1,33.07 6.1,51.51 5.94,51.66 5.94,53.8 v7.32,55.17 | v9.14,54.86 10.36,54.86 10.52,55.02 31.85,55.02 v32.16,54.71
GPIO10_SDO  (via drill 0.25)
  Top 0.152: v8.53,33.68 7.32,33.68 IC2.4 | v6.55,51.82 7.32,52.58 7.92,52.58 8.08,52.43 8.69,52.43 8.84,52.58 8.99,52.58 9.6,53.19 9.6,54.41 10.36,55.17 26.67,55.17 27.43,54.41 27.43,53.19 28.04,52.58 29.26,52.58 30.48,51.36 31.09,51.36 X1.19
  Bottom 0.152: v8.53,33.68 8.53,44.2 6.55,46.18 v6.55,51.82
GPIO11_SCK  (via drill 0.25)
  Top 0.152: v33.98,49.07 31.39,49.07 28.8,46.48 25.45,46.48 23.16,44.2 23.16,28.65 18.14,23.62 17.53,23.62 16.92,23.01 14.48,23.01 14.33,23.16 14.17,23.16 14.02,23.01 13.72,23.01 13.41,23.32 13.41,24.54 9.3,28.65 6.86,28.65 6.1,29.41 6.1,32.31 6.25,32.46 7.16,32.46 IC2.6
  Bottom 0.152: v33.98,49.07 34.59,49.68 34.59,49.84 35.97,51.21 36.27,51.21 X1.23
GPIO12_PWM0  (via drill 0.25)
  Top 0.152: v30.79,44.2 32.61,44.2 IC3.7
  Bottom 0.152: v30.79,44.2 30.79,46.48 31.09,46.79 31.09,47.4 32.92,49.23 32.92,50.44 32.61,50.75 32.61,51.66 33.53,52.58 34.29,52.58 35.05,53.34 35.05,54.1 35.97,55.02 39.32,55.02 40.23,54.1 40.23,53.34 41,52.58 45.26,52.58 46.33,53.65 X1.32
GPIO13_PWM1  (via drill 0.25)
  Top 0.152: v15.54,36.42 12.34,36.42 11.28,35.36 11.28,33.53 8.23,30.48 7.32,30.48 IC2.9 | v38.41,41.3 39.01,40.69 39.32,40.69 41,42.37 41,42.67 41.3,42.98 41.3,44.96 46.18,49.84 47.24,49.84 48.62,51.21 48.92,51.21 X1.33
  Bottom 0.152: v15.54,36.42 32.61,36.42 37.49,41.3 v38.41,41.3
GPIO14_TX  (via drill 0.25)
  Top 0.152: v8.53,32.16 8.23,31.85 7.32,31.85 IC2.7 | X1.8 15.85,53.65 15.85,53.19 14.78,52.12 14.78,51.21 14.63,51.05 14.63,50.6 13.69,49.66 11.56,49.66 v10.36,48.46
  Bottom 0.152: v8.53,32.16 8.53,32.92 9.75,34.14 9.75,40.08 9.14,40.69 9.14,47.24 v10.36,48.46
GPIO15_RX
  Top 0.152: IC2.1 7.32,35.81 7.32,37.8 7.16,37.95 7.16,39.93 7.47,40.23 8.69,40.23 8.84,40.39 8.99,40.23 9.75,41 9.75,42.37 12.34,44.96 15.7,44.96 17.23,46.48 18.14,46.48 19.81,48.16 19.81,52.12 18.59,53.34 18.59,53.65 X1.10
GPIO16  (via drill 0.25)
  Top 0.152: v35.2,49.68 35.2,49.53 34.14,48.46 33.83,48.46 33.53,48.77 31.55,48.77 29.26,46.48 29.26,45.87 30.18,44.96 32.61,44.96 IC3.6
  Bottom 0.152: v35.2,49.68 46.63,49.68 47.85,50.9 47.85,51.66 48.77,52.58 50.44,52.58 51.51,53.65 X1.36
GPIO17  (via drill 0.25)
  Top 0.152: v14.63,42.98 14.33,42.98 14.17,42.82 14.17,41.91 IC1.5
  Bottom 0.152: X1.11 21.03,51.21 19.81,49.99 18.36,49.99 14.63,46.26 v14.63,42.98
GPIO19  (via drill 0.25)
  Top 0.152: v34.59,48.16 32.77,48.16 IC3.1
  Bottom 0.152: v34.59,48.16 36.42,48.16 37.64,49.38 49.68,49.38 51.51,51.21 X1.35
GPIO20  (via drill 0.25)
  Top 0.152: v33.83,45.57 32.77,45.57 IC3.5
  Bottom 0.152: v33.83,45.57 34.29,45.57 37.49,48.77 50.75,48.77 52.88,50.9 52.88,52.58 53.95,53.65 X1.38
GPIO21  (via drill 0.25)
  Top 0.152: v40.39,48.16 39.78,48.77 35.97,48.77 34.44,47.24 34.44,46.94 33.68,46.18 32.77,46.18 IC3.4
  Bottom 0.152: v40.39,48.16 52.73,48.16 55.47,50.9 55.47,52.58 56.54,53.65 X1.40
GPIO22
  Top 0.152: IC2.3 7.32,34.44 9.17,34.44 13.17,38.44 13.17,39.21 13.95,39.99 15.3,39.99 16.46,41.15 16.46,42.82 17.53,43.89 18.44,43.89 25.76,51.21 26.06,51.21 X1.15
GPIO26  (via drill 0.25)
  Top 0.152: v30.18,46.18 30.48,46.18 31.09,46.79 32.61,46.79 IC3.3 | v35.05,54.86 35.51,54.86 35.81,55.17 v40.39,55.17
  Bottom 0.152: v30.18,46.18 30.18,46.48 29.87,46.79 29.87,48.46 30.79,49.38 30.79,49.99 30.02,50.75 30.02,51.66 30.94,52.58 31.7,52.58 32.61,53.49 32.61,54.25 33.38,55.02 34.9,55.02 v35.05,54.86 | v40.39,55.17 54.41,55.17 55.32,54.25 55.32,52.88 54.1,51.66 54.1,51.36 X1.37
JDECAY  (via drill 0.25)
  Top 0.152: RN2.1 24.99,11.73 24.99,11.12 RN2.3 24.84,11.12 24.23,11.12 23.77,10.67 23.77,7.16 22.4,5.79 22.4,5.18 J1.2 | v41.76,19.81 42.82,19.81 IC4.19 | v39.01,3.96 39.01,3.35 v38.41,2.74 | v41.3,39.78 41.45,39.93 42.37,39.93 IC5.19 | v43.59,23.32 v42.06,24.84
  Bottom 0.152: v41.76,19.81 41.76,19.51 42.22,19.05 | 42.22,19.05 42.37,18.9 42.37,11.12 39.01,7.77 v39.01,3.96 | v38.41,2.74 24.69,2.74 J1.2 | v41.3,39.78 41.91,39.17 41.91,34.44 38.1,30.63 38.1,28.8 v42.06,24.84 | v43.59,23.32 44.81,22.1 44.81,21.64 42.22,19.05
JM0  (via drill 0.25)
  Top 0.152: v37.03,33.38 37.03,33.98 RN1.7 | v41.3,36.73 42.37,36.73 IC5.24 | v38.71,19.81 41.91,16.61 42.82,16.61 IC4.24
  Bottom 0.152: 37.19,33.38 37.34,33.38 40.69,36.73 v41.3,36.73 | 37.19,21.34 v38.71,19.81 | 37.19,33.38 v37.03,33.38 | 37.19,21.34 32,16.15 25.45,16.15 19.36,10.06 19.36,5.18 J5.1 | 37.19,33.38 37.19,25.17 36.34,25.17 36.34,21.35 37.19,21.35 37.19,21.34
JM1  (via drill 0.25)
  Top 0.152: 38.56,33.98 39.01,33.98 41.15,36.12 42.37,36.12 IC5.25 | 38.56,33.98 37.8,33.98 RN1.8 | 38.1,19.81 38.1,19.96 v38.71,20.57 | 38.1,19.81 38.1,19.66 41.91,15.85 42.82,15.85 IC4.25 | 38.56,33.98 v38.56,33.83 | v26.06,13.26 26.21,13.26 v27.13,14.17 | 38.1,19.81 v37.95,19.81
  Bottom 0.152: v38.71,20.57 38.41,20.57 37.49,21.49 37.49,21.65 36.64,21.65 36.64,24.87 37.49,24.87 37.49,32.77 v38.56,33.83 | v26.06,13.26 25.91,13.26 20.88,8.23 20.88,4.88 19.81,3.81 18.9,3.81 17.68,5.03 16.76,5.03 J5.3 | v27.13,14.17 30.79,14.17 36.42,19.81 v37.95,19.81
JM2  (via drill 0.25)
  Top 0.152: 25.76,12.34 25.6,12.5 21.64,12.5 J5.5 | 25.76,12.34 25.91,12.19 25.76,12.04 25.76,10.82 25.3,10.36 24.99,10.36 RN2.5 | 25.76,12.34 v25.91,12.5 | IC4.26 42.82,15.24 v41.76,15.24 37.34,19.66 37.34,19.96 38.41,21.03 v38.41,21.34 | v41.3,35.51 42.37,35.51 IC5.26
  Bottom 0.152: v41.76,15.24 41.76,10.97 37.95,7.16 37.95,4.12 37.49,3.66 30.94,3.66 28.19,6.4 28.19,12.04 27.74,12.5 v25.91,12.5 | v41.3,35.51 41.3,34.29 37.8,30.79 37.8,24.96 40.58,24.96 40.58,23.81 38.41,23.81 v38.41,21.34
L3V3  (via drill 0.25)
  Top 0.152: RN1.2 34.44,34.14 33.98,34.14 RN1.1 33.98,33.98 33.98,29.26 40.54,22.71 | C12.2 41.15,22.55 41.76,22.55 41.91,22.4 42.82,22.4 IC4.15 | 40.84,22.71 41.15,22.71 C12.2 | 40.84,22.71 40.54,22.71 | v31.09,4.27 31.09,3.2 VR3.3 | 40.54,22.71 v40.39,22.55 | 40.84,22.71 41.15,22.4 41.15,21.64 41.76,21.03 42.82,21.03 IC4.17 | 40.84,22.71 C12.2
  Bottom 0.152: v31.09,4.27 31.09,10.97 40.39,20.27 v40.39,22.55
LAOUT1  (via drill 0.3)
  Top 0.483: IC4.5 48.88,16.57 49.75,16.57 49.82,16.64 v50.67,16.64
  Bottom 0.508: J3.1 59.82,13.45 56.63,16.64 v50.67,16.64
LAOUT2  (via drill 0.3)
  Top 0.508: IC4.7 49.74,17.84 49.99,17.58 49.99,17.48 v50.16,17.31
  Bottom 0.508: J3.2 59.05,15.4 57.06,17.4 50.29,17.4 50.2,17.31 v50.16,17.31
LBOUT1  (via drill 0.3)
  Top 0.508: IC4.10 49.8,19.79 v50.16,19.43 | v53.34,22.73 57.48,22.73 J3.3
  Bottom 0.508: v50.16,19.43 50.42,19.43 53.34,22.35 v53.34,22.73
LBOUT2  (via drill 0.3)
  Top 0.483: IC4.8 49.99,18.49
  Top 0.508: 49.99,18.49 v50.04,18.54
  Bottom 0.508: J3.4 57.32,25.4 50.46,18.54 v50.04,18.54
LISENA
  Top 0.152: R11.2 40.69,12.95 45.72,12.95 47.88,15.12 47.88,16.86 48.22,17.19 IC4.6
LISENB
  Top 0.152: IC4.9 48.68,19.31 48.05,19.31 47.69,19.66 47.69,20.85 47.26,21.28 R10.2
LVREF  (via drill 0.25)
  Top 0.152: IC4.12 48.92,21.18 48.92,21.64 IC4.13 48.92,21.79 49.68,21.79 49.84,21.95 51.82,21.95 53.65,20.12 v53.65,19.81 | v28.96,4.88 29.87,5.79 29.87,6.25 VR3.2
  Bottom 0.152: v28.96,4.88 29.26,4.88 30.79,3.35 42.06,3.35 44.81,6.1 46.48,6.1 49.53,9.14 60.35,9.14 61.11,9.91 61.11,15.85 57.15,19.81 v53.65,19.81
N$1
  Top 0.305: C13.1 51.57,32.6 51.57,32.54 51.39,32.36 50.12,32.36 49.94,32.54 49.94,32.56 IC5.1
N$2
  Top 0.152: RX.2 12.19,22.55 11.28,23.47 11.28,24.23 11.43,24.38 R5.1
N$3
  Top 0.152: PWR.2 8.38,7.16 10.06,7.16 10.52,6.71 11.43,6.71 R6.2
N$4
  Top 0.152: C6.1 15.85,32.61 16.76,32.61 17.07,32.31 17.53,32.31 U1.21
N$5
  Top 0.305: IC4.1 49.36,13.94 50.62,12.68 52.02,12.68 53.01,13.66 C7.1
N$6
  Top 0.305: IC4.2 48.97,14.47 49.71,14.47 50.47,13.72 C7.2
N$7
  Top 0.305: IC5.2 48.49,34.66 49.24,34.66 50.49,33.4 C13.2
N$8
  Top 0.305: IC4.3 50.41,15.24 50.52,15.14 51.26,15.14 C8.1 52.52,14.85 53.65,14.85 53.83,15.03 53.83,15.1 54.23,15.49 54.23,20.17 R7.1
N$9  (via drill 0.3)
  Top 0.305: C14.1 50.6,35.17 49.5,35.17 49.25,35.43 IC5.3 47.63,35.43 47.33,35.13 47.33,34.77 47.2,34.64 v47.2,34.46
  Top 0.508: R12.1 41.6,33.5 44.16,33.5 44.4,33.73 v45.59,33.73
  Bottom 0.508: v45.59,33.73 46.32,34.46 v47.2,34.46
N$10
  Top 0.152: TX.2 7.32,22.1 7.32,22.71 7.01,23.01 6.86,23.01 6.4,23.47 6.4,24.38 R4.1
N$11
  Top 0.152: IC6.7 7.16,46.33 6.25,46.33 5.94,46.02 5.94,42.67 6.1,42.52 6.1,39.93 5.33,39.17 R21.1 5.18,39.01 3.2,41 2.59,41 J4.2
PB0  (via drill 0.25)
  Top 0.152: v46.02,27.28 46.02,23.01 44.35,21.34 44.2,21.34 44.04,21.18 44.2,21.03 44.04,20.88 44.04,19.51 43.74,19.2 42.98,19.2 IC4.20 | IC1.11 13.41,47.55 13.41,46.97 14.25,46.13 v15.19,46.13
  Bottom 0.152: v46.02,27.28 46.02,29.87 50.44,34.29 50.44,36.12 49.99,36.58 49.53,36.58 44.35,41.76 44.35,43.43 39.93,47.85 37.03,47.85 31.55,42.37 30.79,42.37 25.6,47.55 U1.14 25.45,47.55 18.9,47.55 17.48,46.13 v15.19,46.13
PB1
  Top 0.152: IC1.10 14.17,47.55 14.17,46.63 16.15,46.63 17.07,47.55 17.53,47.55 U1.15
PB2_CS#  (via drill 0.25)
  Top 0.152: v11.89,34.44 13.11,34.44 IC2.18 | v10.52,42.37 10.52,42.67 12.5,44.65 16.61,44.65 16.92,44.96 17.53,44.96 U1.16
  Bottom 0.152: v11.89,34.44 11.89,38.86 9.75,41 9.75,41.6 v10.52,42.37
PB3_SDI  (via drill 0.25)
  Top 0.152: v14.33,33.83 14.17,33.68 13.26,33.68 IC2.17 | v16.76,40.69 16.76,41 17.68,41.91 17.68,42.37 U1.17
  Bottom 0.152: v14.33,33.83 14.33,38.25 v16.76,40.69
PB4_SDO  (via drill 0.25)
  Top 0.152: v14.33,33.07 13.26,33.07 IC2.16
  Bottom 0.152: v14.33,33.07 14.94,33.68 14.94,37.34 17.53,39.93 U1.18
PB5_SCK
  Top 0.152: IC2.15 13.26,32.46 14.48,32.46 14.94,32.92 14.94,33.83 15.39,34.29 16.61,34.29 17.07,33.83 18.14,33.83 18.75,34.44 18.75,35.66 17.68,36.73 17.68,37.34 U1.19
PC0  (via drill 0.25)
  Top 0.152: v33.38,35.05 33.38,35.36 33.53,35.51 33.83,35.51 RN1.16 33.98,35.51 34.14,35.66 33.98,35.81 33.98,36.12 v34.9,37.03 | IC2.13 13.26,31.09 14.24,31.09 17.22,28.11 17.22,27.89 17.53,27.58 17.53,27.28 U1.23 | v39.17,40.08 39.78,40.69 42.37,40.69 IC5.18
  Bottom 0.152: v33.38,35.05 33.38,34.75 26.52,27.89 26.52,26.98 25.91,26.36 18.44,26.36 17.68,27.13 U1.23 | v34.9,37.03 36.34,37.03 39.17,39.86 v39.17,40.08
PC1  (via drill 0.25)
  Top 0.152: v33.38,30.79 33.38,34.29 33.83,34.75 34.29,34.75 34.59,35.05 34.59,35.51 RN1.15 | IC2.12 13.26,30.48 14.42,30.48 16.46,28.44 16.46,26.06 17.68,24.84 U1.24 | v36.58,31.09 40.39,34.9 42.37,34.9 IC5.27
  Bottom 0.152: U1.24 17.68,24.84 18.44,25.6 28.96,25.6 33.38,30.02 v33.38,30.79 33.68,31.09 v36.58,31.09
PC2  (via drill 0.25)
  Top 0.152: v41.3,39.01 41.6,39.32 42.37,39.32 IC5.20 | v36.58,28.35 v38.71,30.48 | v19.66,23.47 18.29,22.1 17.68,22.1 U1.25
  Bottom 0.152: v41.3,39.01 40.69,39.62 40.69,39.93 41.15,40.39 41.45,40.39 42.22,39.62 42.22,33.98 v38.71,30.48 | v36.58,28.35 33.07,28.35 25.91,21.18 21.95,21.18 v19.66,23.47
PC3  (via drill 0.25)
  Top 0.152: v40.54,38.71 40.84,38.41 41.45,38.41 41.6,38.56 42.37,38.56 IC5.21 | v18.44,23.01 v22.4,26.98 | v36.27,37.64 37.29,36.63 v37.29,36.42
  Bottom 0.152: v40.54,38.71 39.78,38.71 37.49,36.42 v37.29,36.42 | v36.27,37.64 34.75,37.64 25.3,28.19 23.62,28.19 v22.4,26.98 | v18.44,23.01 18.44,22.71 18.59,22.55 18.59,20.57 17.68,19.66 U1.26
PC4_SDA  (via drill 0.25)
  Top 0.152: v11.89,46.48 12.04,46.48 12.19,46.63 12.19,47.55 IC1.13 | v12.5,43.89 13.72,43.89 13.87,44.04 v15.24,44.04 | v23.77,42.22 23.77,26.82 v19.2,22.25
  Bottom 0.152: v19.2,22.25 19.2,18.75 17.68,17.22 U1.27 | v12.5,43.89 11.91,44.48 11.91,44.66 11.89,44.68 v11.89,46.48 | v15.24,44.04 15.56,44.04 16.26,43.35 18.2,43.35 19.33,42.22 v23.77,42.22
PC5_SCL  (via drill 0.25)
  Top 0.152: v9.3,21.18 12.19,18.29 14.94,18.29 17.22,16 17.22,15.54 17.53,15.24 17.53,14.63 U1.28 | IC1.12 12.8,47.55 12.8,46.71 12.04,45.95 11.83,45.95 10.29,44.41 10.29,44.37 v10.11,44.2
  Bottom 0.152: v9.3,21.18 7.92,22.55 7.92,30.18 10.06,32.31 10.06,40.23 9.45,40.84 9.45,42.06 10.11,42.72 v10.11,44.2
PD0_RX  (via drill 0.3)
  Top 0.152: IC2.14 13.11,31.85 12.04,31.85 11.89,31.7 11.89,26.82 14.33,24.38 R5.2 15.6,24.38 v15.65,24.43
  Bottom 0.152: U1.2 25.45,17.22 24.99,17.22 18.59,23.62 18.59,23.77 16.7,23.77 16.09,24.38 15.7,24.38 v15.65,24.43
PD1_TX  (via drill 0.25)
  Top 0.152: v15.54,35.66 13.26,35.66 IC2.20 | v10.52,25.45 9.45,24.38 R4.2 9.3,24.38 9.3,23.47 11.73,21.03 17.68,21.03 19.36,19.36 24.54,19.36 24.69,19.51 25.45,19.51 U1.3
  Bottom 0.152: v15.54,35.66 15.54,33.22 10.52,28.19 v10.52,25.45
PD2  (via drill 0.25)
  Top 0.152: v33.38,29.26 32.77,29.87 32.77,35.66 34.75,37.64 35.05,37.64 35.66,37.03 35.66,35.66 RN1.13 | IC4.27 42.82,14.63 37.95,14.63 30.94,21.64 26.36,21.64 25.91,22.1 25.6,22.1 U1.4
  Bottom 0.152: v33.38,29.26 33.07,29.26 26.06,22.25 25.6,22.25 U1.4
PD4  (via drill 0.25)
  Top 0.152: 41.15,19.96 41.15,18.59 41.91,17.83 42.82,17.83 IC4.22 | 41.15,19.96 41.6,20.42 42.82,20.42 IC4.18 | v35.05,36.27 35.05,35.66 RN1.14 | 41.15,19.96 40.54,19.96 33.83,26.67 26.36,26.67 25.91,27.13 25.6,27.13 U1.6
  Bottom 0.152: v35.05,36.27 33.83,36.27 25.6,28.04 25.6,27.28 U1.6
PD6  (via drill 0.25)
  Top 0.152: v34.9,43.59 40.39,38.1 42.37,38.1 IC5.22
  Bottom 0.152: v34.9,43.59 33.22,43.59 31.7,42.06 25.91,42.06 25.6,42.37 U1.12
PD7  (via drill 0.25)
  Top 0.152: v41.76,18.75 41.76,18.59 41.91,18.44 42.82,18.44 IC4.21 | v37.95,16.46 36.58,17.83 35.2,17.83 26.82,26.21 24.99,26.21 24.38,26.82 24.38,43.59 25.45,44.65 25.45,44.96 U1.13
  Bottom 0.152: v41.76,18.75 40.23,18.75 v37.95,16.46
R3V3  (via drill 0.25)
  Top 0.152: 35.05,34.14 35.51,34.14 RN1.4 | C18.2 42.98,44.2 v42.98,43.28 42.98,42.82 42.82,42.67 42.52,42.67 IC5.15 42.37,42.52 41.45,42.52 41.3,42.37 41.3,41.45 41.45,41.3 42.37,41.3 IC5.17 | v35.05,34.75 35.05,34.14 | 35.05,34.14 RN1.3 | v37.34,4.27 37.34,3.2 VR4.3
  Bottom 0.152: 41.3,41 42.98,42.67 v42.98,43.28 | v37.34,4.27 37.34,16.61 42.67,21.95 42.67,39.62 41.3,41 | 41.3,41 37.21,36.91 37.09,36.91 36.8,36.62 36.8,36.51 35.31,35.01 35.31,35 v35.05,34.75
RAOUT1  (via drill 0.3)
  Top 0.508: IC5.5 49.43,36.73 v49.78,37.08
  Bottom 0.508: v49.78,37.08 55.93,37.08 59.82,33.2 J3.5
RAOUT2  (via drill 0.3)
  Top 0.483: 49.85,38.03 IC5.7
  Top 0.508: v49.91,37.97 49.85,38.03
  Bottom 0.508: v49.91,37.97 56.23,37.97 58.8,35.4 J3.6
RBOUT1  (via drill 0.3)
  Top 0.508: IC5.10 49.43,39.98 v49.78,39.62
  Bottom 0.508: v49.78,39.62 56.5,39.62 57.28,40.4 J3.7
RBOUT2  (via drill 0.3)
  Top 0.508: IC5.8 49.6,38.68 v49.78,38.86 | v56.52,38.86 56.52,42.1 J3.8
  Bottom 0.508: v49.78,38.86 v56.52,38.86
RESET#  (via drill 0.25)
  Top 0.152: S1.4 7.16,16.61 7.32,16.46 11.73,16.46 R3.1 11.89,16.46 12.65,16.46 15.7,13.41 23.93,13.41 24.99,14.48 25.45,14.48 U1.1 | v41.76,21.79 42.82,21.79 IC4.16 42.98,21.79 44.04,21.79 v44.2,21.95 | v43.74,41.91 42.52,41.91 IC5.16
  Bottom 0.152: v41.76,21.79 41,22.55 41,22.71 40.54,23.16 40.23,23.16 39.32,22.25 39.32,19.66 33.22,13.56 26.52,13.56 25.6,14.48 U1.1 | v43.74,41.91 43.74,29.41 42.98,28.65 42.98,23.16 v44.2,21.95
RISENA
  Top 0.152: IC5.6 48.21,37.21 47.57,37.21 47.41,37.05 47.41,35.81 46.93,35.33 46.93,34.91 46.1,34.08 46.1,33.52 44.88,32.3 R16.2
RISENB
  Top 0.152: IC5.9 48.21,39.5 47.57,39.5 47.3,39.77 R15.2
RVREF  (via drill 0.25)
  Top 0.152: 48.46,41.91 48.46,41.3 IC5.12 | v39.62,7.62 38.41,6.4 36.42,6.4 VR4.2 | v49.53,41.76 49.38,41.91 48.46,41.91 | 48.46,41.91 IC5.13
  Bottom 0.152: v39.62,7.62 49.99,17.98 51.05,17.98 57.15,24.08 60.2,24.08 61.11,24.99 61.11,40.84 60.2,41.76 v49.53,41.76
XTAL1
  Top 0.152: Y1.2 30.18,34.75 27.74,34.75 C4.2 27.58,34.75 26.82,34.75 26.36,34.29 25.91,34.75 25.6,34.75 U1.9
XTAL2
  Top 0.152: Y1.1 30.18,37.34 27.74,37.34 C3.2 27.58,37.34 26.82,37.34 26.36,36.88 25.91,37.34 25.6,37.34 U1.10

## Text on the board
tNames: 5V | GND | TX | RX | 3V3 | RB2 | WP | + | + | RESET | + | MODE2 | MODE1 | MODE0 | VCC | LA1 | DECAY | GND | VCC
bNames: TagGang Pi HAT / / Made with <3 by / Ella Moss and / Dana Escandor